# Altium PCB Telemetria2.PcbDoc
Units mm, origin at the board's own origin, x right, y up, seen from the top; angles counter-clockwise.
Board outline 142.6 x 97.6 mm, 2 copper layers (Top Layer, Bottom Layer); 24 components, 20 nets, 109 pads, 0 vias.
Unrouted connection lines stored in the file: 51.
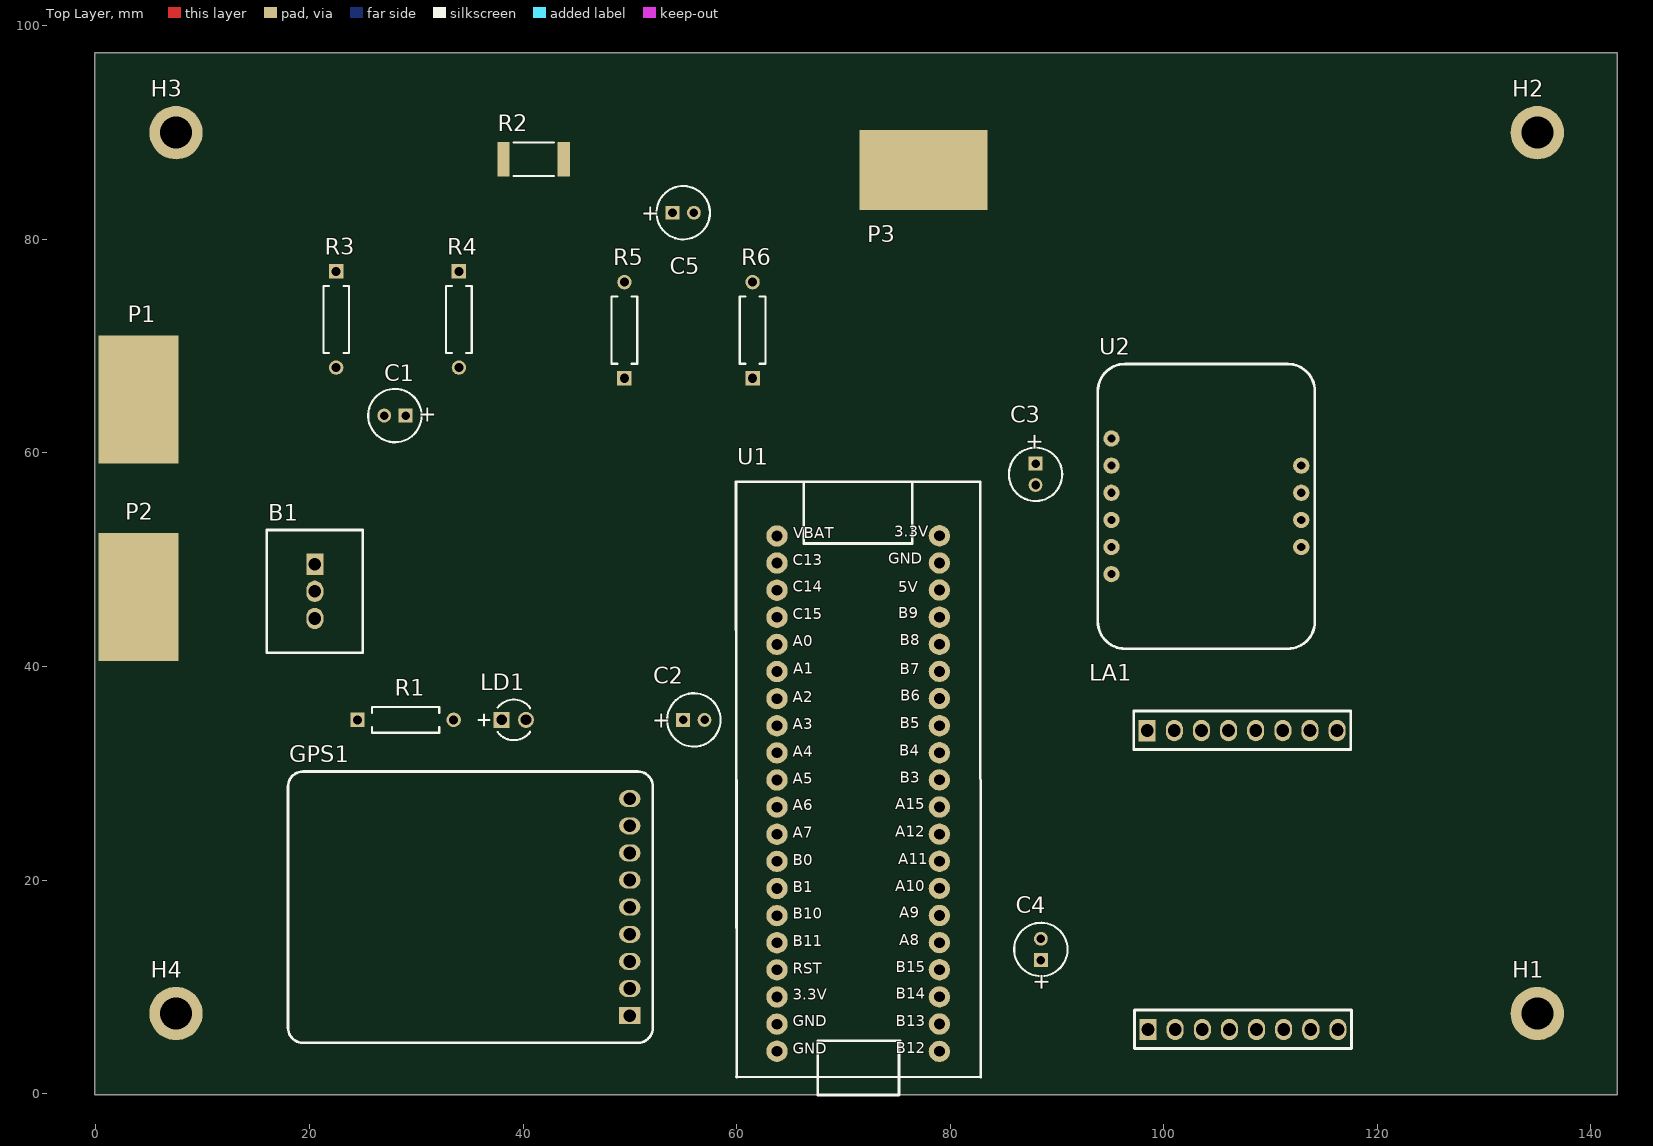
[diagram p0: Top Layer view]
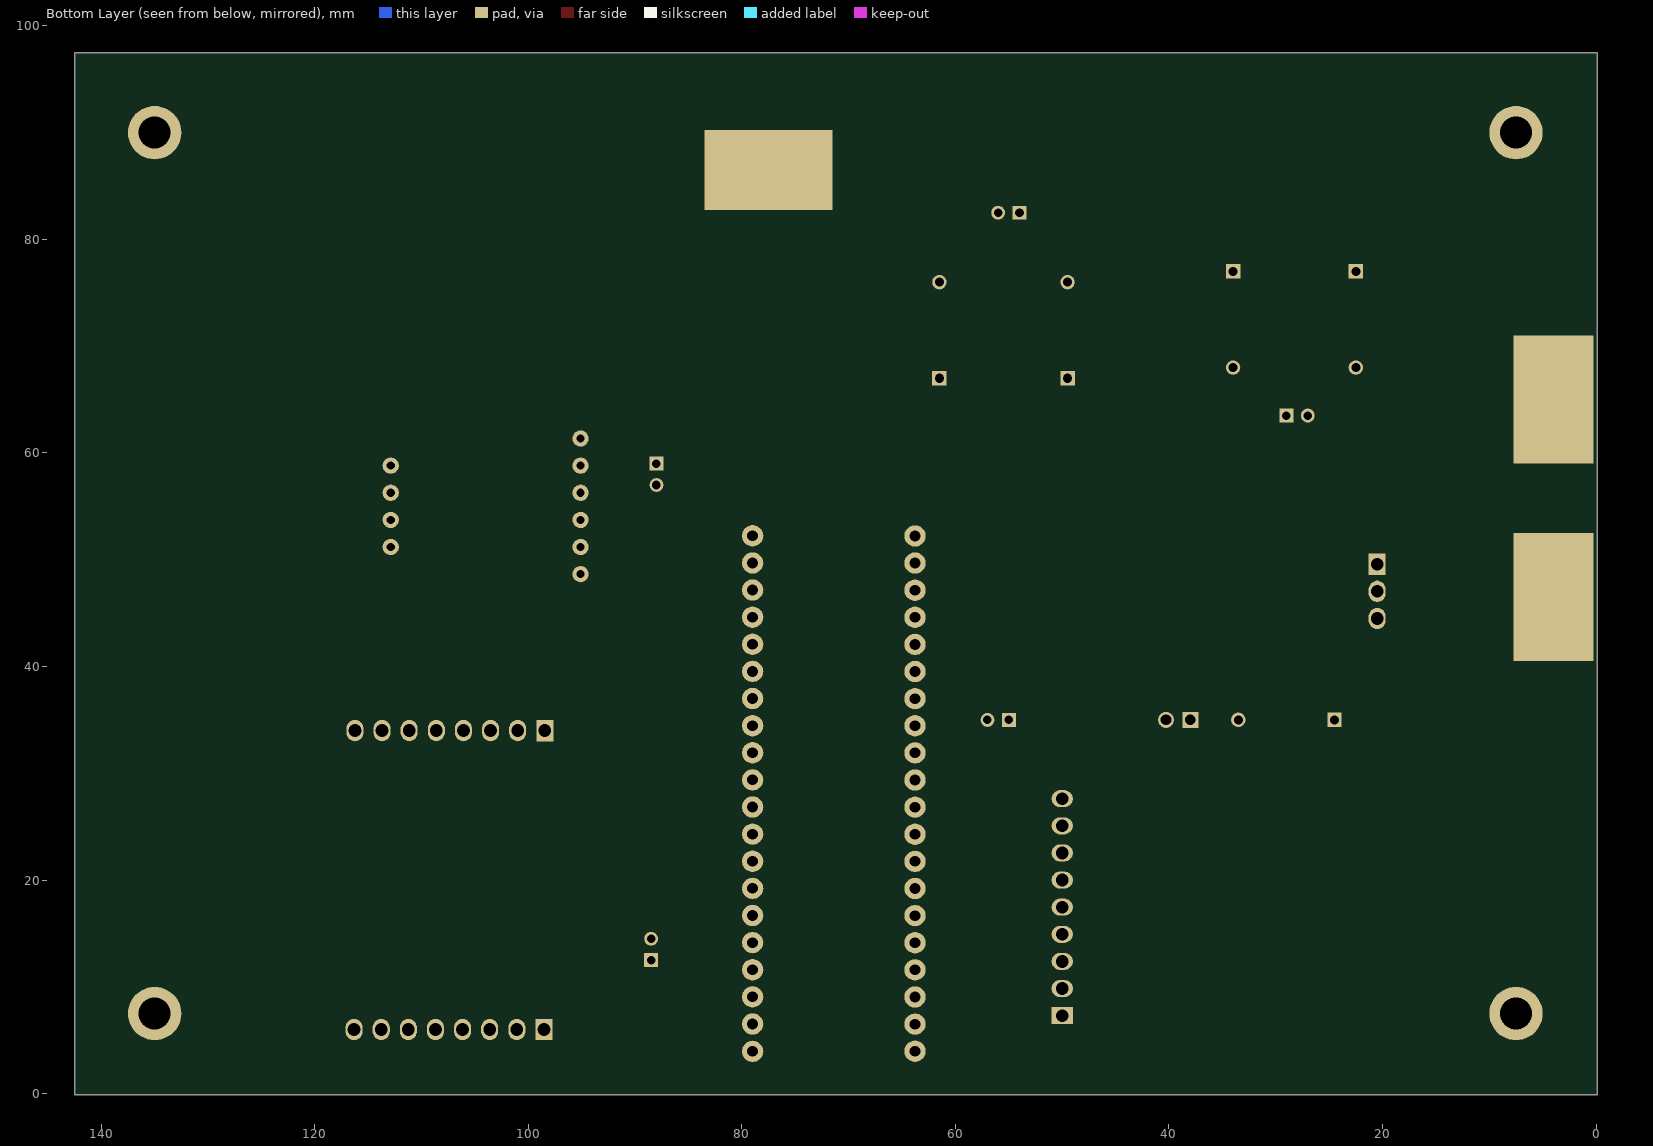
[diagram p1: Bottom Layer view, seen from below]

## Layer stack, top to bottom
Top Solder: solder mask 0.0102, Solder Resist, Dk 3.5
Top Layer: signal copper 0.0356
Dielectric 1: dielectric 0.32, FR-4, Dk 4.8
Bottom Layer: signal copper 0.0356
Bottom Solder: solder mask 0.0102, Solder Resist, Dk 3.5

## Board outline
-0.1,-0.1 142.5,-0.1 142.5,97.5 -0.1,97.5

## Design rules (kind name [scope] priority, off if disabled: settings)
Clearance Clearance_1 [OnMid vs OnMid] p1: gap=0.254 ignorepadtopadclearanceinfootprint=FALSE sourcerule=37 cellrowname=All cellrowtype=0 cellcolname=All cellcoltype=0 innerlayers=TRUE
Clearance Clearance_2 [(ExistsOnLayer('Top Layer') Or ExistsOnLayer('Bottom Layer')) vs (ExistsOnLayer('Top Layer') Or ExistsOnLayer('Bottom Layer'))] p2: gap=0.254 ignorepadtopadclearanceinfootprint=FALSE sourcerule=37 cellrowname=All cellrowtype=0 cellcolname=All cellcoltype=0 outerlayers=TRUE
Clearance [All] p3: gap=0.254 ignorepadtopadclearanceinfootprint=FALSE ismatrix=TRUE
PolygonConnect [All] p1: connectstyle=Relief reliefconductorwidth=0.254 reliefentries=4 polygonreliefangle="90 Angle" airgapwidth=0.254
RoutingVias [All] p1: holewidth=0.711 width=1.27 viastyle="Through Hole" minholewidth=0.711 minwidth=1.27 maxholewidth=0.711 maxwidth=1.27
SolderMaskExpansion [All] p1: expansion=0.102 istentingtop=FALSE
Width MaxMinWidth_3 [All] p1: maxlimit=10 minlimit=0.254 preferedwidth=0.254 minimp=50.000000 maximp=50.000000 favimp=50.000000
Width [All] p2: maxlimit=0.254 minlimit=0.254 preferedwidth=0.254
30 further rules are at their usual default settings.

## Classes and differential pairs
component class Telemetria: B1 C1 C2 C3 C4 C5 GPS1 H1 H2 H3 H4 LA1 LD1 P1 P2 P3 R1 R2 R5 R6 U1 U2

## Components (designator, comment, footprint, x,y, rotation, side; value= is the part's Value field where it differs from the comment)
B1 "Stepdown 5V" "StepDown 5V" 20.5,47.04 r270 top
C1 "ECA1HM100" CAPPR55-200-1100X500X1200 28,63.5 r180 top value=10µF
C2 "ECA1HM100" CAPPR55-200-1100X500X1200 56,35 r0 top value=10µF
C3 "ECA1HM100" CAPPR55-200-1100X500X1200 88,58 r270 top value=10µF
C4 "ECA1HM100" CAPPR55-200-1100X500X1200 88.5,13.5 r90 top value=10µF
C5 "ECA1HM100" CAPPR55-200-1100X500X1200 55,82.5 r0 top value=10µF
GPS1 "Adafruit GPS Breakout" "Adafruit GPS breakout" 50,17.46 r90 top
H1 "Hole" Hole 135,7.5 r0 top
H2 "Hole" Hole 135,90 r0 top
H3 "Hole" Hole 7.5,90 r0 top
H4 "Hole" Hole 7.5,7.5 r0 top
LA1 "RFM95W Adapter" "Lora Adapter" 128.66,2 r90 top
LD1 "304090040" LED-2P-2.28-3MM 39.14,35 r0 top
P1 "High power pad" HIGH_POWER_PAD#1 4,65 r0 top
P2 "High power pad" HIGH_POWER_PAD#1 4,46.5 r0 top
P3 "High power pad" HIGH_POWER_PAD#2 77.5,86.5 r0 top
R1 "MFR-25FBF52-475R" RESA60-630X240 29,35 r0 top value=475
R2 "CRCW25121R00FKEG" FP-CRCW2512-e3-IPC_C 41,87.5 r0 top
R3 "MFR-25FBF52-1K" RESA60-630X240 22.5,72.5 r270 top value=13k
R4 "MFR-25FBF52-1K" RESA60-630X240 34,72.5 r270 top value=1k
R5 "MFR-25FBF52-1K" RESA60-630X240 49.5,71.5 r90 top value=13k
R6 "MFR-25FBF52-1K" RESA60-630X240 61.5,71.5 r90 top value=1k
U1 "STM32F103C8T6" "Stm32 BluePill" 71.172,33.863 r0 top
U2 "Bno055_Adafruit" Bno055_Adafruit 104,55 r270 top

## Footprints (in the part's own frame and the unit in brackets; to place one, negate y for a bottom-side part, rotate by r counter-clockwise, add the part's x,y. Pads: shape width x height; smd on the part's side, far side on the other; paste and mask are expansions set on the pad)
"Adafruit GPS breakout" [mm]
  rect 1.6x2 hole 1.2: 1(-10.16,0)
  oval 1.6x2 hole 1.2: 2(-7.62,0) 3(-5.08,0) 4(-2.54,0) 5(0,0) 6(2.54,0) 7(5.08,0) 8(7.62,0) 9(10.16,0)
  silkscreen extent -12.7,-2.16 12.7,32
Bno055_Adafruit [mil]
  round 60 hole 30: 1(-250,-350) 2(-150,-350) 3(-50,-350) 4(50,-350) 5(150,-350) 6(250,-350) 7(-150,350) 8(-50,350) 9(50,350) 10(150,350)
  silkscreen extent -525,-400 525,400, body extent -525,-402 525,398, height 164
CAPPR55-200-1100X500X1200 [mm] "THD, 2-Leads, Dia 5mm, Pin Spacing 2mm"
  rect 1.3x1.3 hole 0.8: 1(-1,0)
  round 1.3 hole 0.8: 2(1,0)
  silkscreen extent -2.5,-2.5 2.5,2.5, body extent -2.5,-2.5 2.45,2.5, height 12
FP-CRCW2512-e3-IPC_C [mm]
  rect 1.155x3.208 smd paste+0 mask+0: 1(-2.826,0) 2(2.826,0)
  silkscreen extent -1.87,-1.58 1.87,1.58, body extent -3.5,-1.75 3.5,1.75, height 0.25
HIGH_POWER_PAD#1 [mm]
  rect 7.5x12 all layers, no hole: 1(0,0)
HIGH_POWER_PAD#2 [mm]
  rect 12x7.5 all layers, no hole: 1(0,0)
Hole [mm]
  round 5 hole 3: 1(0,0)
LED-2P-2.28-3MM [mm] "LED, 2-Leads, Dia 3mm, Pitch 2.28mm"
  rect 1.5x1.5 hole 1: 1(-1.14,0)
  round 1.5 hole 1: 2(1.14,0)
  silkscreen extent -3.29,-1.9 1.52,1.9, body extent -1.9,-1.91 1.52,1.91, height 5.3
"Lora Adapter" [mm]
  rect 2x1.6 hole 1.2: 1(4,30.12) 9(32,30.2)
  oval 2x1.6 hole 1.2: 2(4,27.58) 3(4,25.04) 4(4,22.5) 5(4,19.96) 6(4,17.42) 7(4,14.88) 8(4,12.34) 10(32,27.66) 11(32,25.12) 12(32,22.58) 13(32,20.04) 14(32,17.5) 15(32,14.96) 16(32,12.42)
  Top Layer lines w0.5: 32,22.58 31.96,22.54 ; 4,12.34 4.66,12.34 4.66,12.178
  silkscreen extent 2.22,11.07 33.83,31.47, body extent -0.1,0.1 35.9,35.6, height 9.78
RESA60-630X240 [mm] "Axial Resistor, 2-Leads, Dia 2.4mm, Body Length 6.3mm"
  rect 1.35x1.35 hole 0.85: 1(-4.5,0)
  round 1.35 hole 0.85: 2(4.5,0)
  silkscreen extent -3.15,-1.2 3.15,1.2, body extent -4.77,-1.19 4.77,1.2, height 2.4
"StepDown 5V" [mm] "Buck converter DC-DC 5V - Mornsun"
  rect 2x1.6 hole 1.2: 1(-2.54,0)
  oval 2x1.6 hole 1.2: 2(0,0) 3(2.54,0)
  silkscreen extent -5.75,-4.49 5.75,4.5, body extent -5.75,-4.6 5.75,4.5, height 17.51
"Stm32 BluePill" [mm]
  round 2 hole 1: 1(7.828,-29.909) 2(7.828,-27.343) 3(7.828,-24.803) 4(7.828,-22.263) 5(7.828,-19.723) 6(7.828,-17.183) 7(7.828,-14.643) 8(7.828,-12.103) 9(7.828,-9.563) 10(7.828,-7.023) 11(7.828,-4.483) 12(7.828,-1.943) 13(7.828,0.597) 14(7.828,3.137) 15(7.828,5.677) 16(7.828,8.217) 17(7.828,10.757) 18(7.828,13.297) 19(7.828,15.837) 20(7.828,18.377) 21(-7.386,18.366) 22(-7.386,15.826) 23(-7.386,13.286) 24(-7.386,10.746) 25(-7.386,8.206) 26(-7.386,5.666) 27(-7.386,3.126) 28(-7.386,0.586) 29(-7.386,-1.954) 30(-7.386,-4.494) 31(-7.386,-7.034) 32(-7.386,-9.574) 33(-7.386,-12.114) 34(-7.386,-14.654) 35(-7.386,-17.194) 36(-7.386,-19.734) 37(-7.386,-22.274) 38(-7.386,-24.814) 39(-7.386,-27.354) 40(-7.386,-29.894)
  silkscreen extent -11.22,-34 11.69,23.43, body extent -11.18,-33.27 11.68,24.29, height 12.31

## Part data
B1: "Buck converter DC-DC 5v Mornsun - K78U05-500R3"
C1 C2 C3 C4 C5: library part CMP-001-00025-7, "Aluminum Electrolytic Capacitor, 10 uF, +/- 20%, 50 V, -40 to 85 degC, 2-Pin THD, RoHS, Bulk", Capacitor Type=Electrolytic, Case/Package=Radial, Manufacturer=Panasonic, Max Operating Temperature=85°C, Min Operating Temperature=-40°C, Package Description="2-Pin Radial Lead, Dia 5 mm, Height 12 mm", Package Quantity=200, Package Reference=CAPPR55-200-1100X500X1200, Ripple Current=65mA, Tolerance=20%, Voltage Rating=50V, Datasheet URL=https://industrial.panasonic.com/cdbs/www-data/pdf/RDF0000/ABA0000C1218.pdf, Datasheet Version="Rev. 05, 10/2016", Diameter=5mm, Lead Pitch=2mm, Manufacturer URL=http://www.panasonic.com/, Mounting Technology=TH, Packaging=Bulk, Pins=2, Ripple Current (AC)=65mA, RoHS Compliant=True
GPS1: library part "Adafruit GPS", "Adafruit GPS Breakout DIP Board"
H1 H2 H3 H4: "Circular hole for attaching PCB"
LA1: library part "Lora Adapter"
LD1: library part CMP-007-00006-2, "Green LED, 80 mW, 20 mA, -25 to 85 degC, 2-Pin THD", Manufacturer="Shenzhen CGX", Package Description="2-Pin Through Hole Device, Dia 3 mm, Pitch 2.28 mm", Case/Package=304090040, Datasheet URL=http://datasheet.octopart.com/304090040-Chengguangxing-datasheet-62330655.pdf, Datasheet Version="Rev. 1.0, 09/2014", Manufacturer URL=http://szcgx.com/, Mounting Technology=TH, Package Reference=304090040, RoHS Compliant=Unknown
P1 P2 P3: library part HIGH_POWER_PAD, "High power pads (7.5 x 15 mm)"
R1: library part CMP-009-00056-4, "Axial Resistor, 475 Ohm, +/- 1%, 0.25 W, -55 to 155 degC, 2-Pin THD, RoHS, Bulk", Case/Package=Axial, Manufacturer=Yageo, Max Operating Temperature=155°C, Min Operating Temperature=-55°C, Package Description="2-Pin Axial Lead, Dia 2.4 mm, Body Length 6.3 mm", Package Quantity=200, Package Reference=MFR-25, Power=250mW, Tolerance=1%, Voltage Rating=250V, Datasheet URL=http://www.yageo.com/documents/recent/Yageo%20LR_MFR_2013.pdf, Datasheet Version=Apr-13, Manufacturer URL=http://www.yageo.com/, Mounting Technology=TH, Packaging=Bulk, RoHS Compliant=True
R2: library part CMP-02407-006956-1, "RES Thick Film, 1Ω, 1%, 1W, 100ppm/°C, 2512", Case Code (Imperial)=2512, Case Code (Metric)=6432, Max Operating Temperature=155°C, Max Power Dissipation=1W, Min Operating Temperature=-55°C, Package Quantity=2000, Resistance=1R, Temperature Coefficient=100ppm/°C, Tolerance=1%, Voltage Rating=500V, Case/Package=2512, Composition="Thick Film", Contact Plating=Tin, Depth=3.15mm, Features="Automotive AEC-Q200", Height=0.6mm, Lead Free="Lead Free", Length=6.3mm, Military Standard=Not, Mount="Surface Mount", Number of Pins=2, Number of Terminations=2, Packaging="Tape and Reel", Power Rating=1W, Radiation Hardening=No, REACH SVHC="No SVHC", Termination=SMD/SMT, Voltage Rating (DC)=500V, Weight=0.001429oz, Width=0.124inch
R3 R4 R5 R6: library part CMP-009-00048-4, "Axial Resistor, 1 KOhm, +/- 1%, 250 mW, -55 to 155 degC, 2-Pin THD, RoHS, Bulk", Case/Package=Axial, Manufacturer=Yageo, Max Operating Temperature=155°C, Min Operating Temperature=-55°C, Package Description="2-Pin Axial Lead, Dia 2.4 mm, Body Length 6.3 mm", Package Quantity=200, Package Reference=MFR-25, Power=250mW, Tolerance=1%, Voltage Rating=250V, Composition=CarbonFilm, Datasheet URL=http://www.yageo.com/documents/recent/Yageo%20LR_MFR_2013.pdf, Datasheet Version=Apr-13, Manufacturer URL=http://www.yageo.com/, Mounting Technology=TH, Packaging=Bulk, RoHS Compliant=True
U1: library part BluePill, "Designed By @Alixahedi"
U2: "Adafruit IMU breakout part 2472 based on Bosch BNO055 IC"

## Nets (pads, with @x,y where several pads share a name; then routed paths per layer and width w, separated by ;. In a path a pad name is that pad's centre, name@x,y a point inside that pad or via, vN(x,y) a via of type N, cw(c..) or ccw(c..) an arc to the next point about the centre after c; other vN are vias at no path point)
3V3: C4.1 LA1.4 U1.20
5V: B1.3 C2.1 C3.1 GPS1.8 LD1.1 U1.18 U2.1
GND: B1.2 C1.2 C2.2 C3.2 C4.2 C5.2 GPS1.7 H1.1 H2.1 H3.1 H4.1 LA1.7 LA1.9 LA1.16 P2.1 R1.2 R4.2 R6.2 U1.19 U1.39 U1.40 U2.3
NetC1_1: C1.1 R3.2 R4.1 U1.29
NetC5_1: C5.1 R5.2 R6.1 U1.30
NetGPS1_5: GPS1.5 U1.28
NetGPS1_6: GPS1.6 U1.27
NetLA1_3: LA1.3
NetLA1_10: LA1.10 U1.12
NetLA1_11: LA1.11 U1.13
NetLA1_12: LA1.12 U1.11
NetLA1_13: LA1.13 U1.10
NetLA1_14: LA1.14
NetLD1_2: LD1.2 R1.1
NetP3_1: P3.1 R2.2 R5.1
NetU1_4: U1.4 U2.9
NetU1_5: U1.5 U2.6
NetU1_14: U1.14 U2.5
NetU1_15: U1.15 U2.4
VBattery: B1.1 P1.1 R2.1 R3.1 | length 0.7
  Top Layer w3: P1.1 P1.1@4.5,64.5
pads on no net: GPS1.1 GPS1.2 GPS1.3 GPS1.4 GPS1.9 LA1.1 LA1.2 LA1.5 LA1.6 LA1.8 LA1.15 U1.1 U1.2 U1.3 U1.6 U1.7 U1.8 U1.9 U1.16 U1.17 U1.21 U1.22 U1.23 U1.24 U1.25 U1.26 U1.31 U1.32 U1.33 U1.34 U1.35 U1.36 U1.37 U1.38 U2.2 U2.7 U2.8 U2.10

## Text inside footprints (layer, text, board x,y; h text height)
C1: Top Overlay "+" at 31.908,64.237 h1.5 r180
C2: Top Overlay "+" at 52.092,34.263 h1.5
C3: Top Overlay "+" at 87.263,61.908 h1.5 r270
C4: Top Overlay "+" at 89.237,9.592 h1.5 r90
C5: Top Overlay "+" at 51.092,81.763 h1.5
U1: Top Overlay "5V" at 75.165,46.557 h1.78; Top Overlay "B9" at 75.165,44.144 h1.78; Top Overlay "B8" at 75.292,41.604 h1.78; Top Overlay "3.3V" at 74.784,51.764 h1.78; Top Overlay "GND" at 74.22,49.25 h1.78; Top Overlay "A5" at 65.259,28.65 h1.78; Top Overlay "A2" at 65.259,36.301 h1.78; Top Overlay "A3" at 65.259,33.756 h1.78; Top Overlay "A4" at 65.259,31.171 h1.78; Top Overlay "RST" at 65.259,10.87 h1.78; Top Overlay "B10" at 65.259,16.001 h1.78; Top Overlay "B11" at 65.259,13.416 h1.78; Top Overlay "A6" at 65.259,26.161 h1.78; Top Overlay "A7" at 65.259,23.576 h1.78; Top Overlay "B0" at 65.259,21.03 h1.78; Top Overlay "B1" at 65.259,18.471 h1.78; Top Overlay "3.3V" at 65.259,8.407 h1.78; Top Overlay "B15" at 74.921,10.972 h1.78; Top Overlay "A8" at 75.228,13.537 h1.78; Top Overlay "A11" at 75.144,21.112 h1.78; Top Overlay "B3" at 75.292,28.752 h1.78; Top Overlay "A9" at 75.259,16.103 h1.78; Top Overlay "A15" at 74.857,26.263 h1.78; Top Overlay "A12" at 74.857,23.678 h1.78; Top Overlay "A10" at 74.857,18.592 h1.78; Top Overlay "VBAT" at 65.331,51.643 h1.78; Top Overlay "B5" at 75.292,33.857 h1.78; Top Overlay "B14" at 74.89,8.488 h1.78; Top Overlay "B7" at 75.292,38.892 h1.78; Top Overlay "B4" at 75.259,31.272 h1.78; Top Overlay "B6" at 75.322,36.423 h1.78; Top Overlay "C15" at 65.259,44.068 h1.78; Top Overlay "C13" at 65.259,49.123 h1.78; Top Overlay "C14" at 65.259,46.634 h1.78; Top Overlay "A0" at 65.259,41.503 h1.78; Top Overlay "A1" at 65.33,38.943 h1.78; Top Overlay "GND" at 65.259,5.917 h1.78; Top Overlay "B13" at 74.911,5.917 h1.78; Top Overlay "GND" at 65.259,3.352 h1.78; Top Overlay "B12" at 74.921,3.408 h1.78